# Altium PCB MAGI'sCore-OCL.PcbDoc
Units mm, origin at the board's own origin, x right, y up, seen from the top; angles counter-clockwise.
Board outline 152.4 x 101.6 mm, 2 copper layers (Top Layer, Bottom Layer); 19 components, 33 nets, 137 pads, 24 vias.
Unrouted connection lines stored in the file: 3.
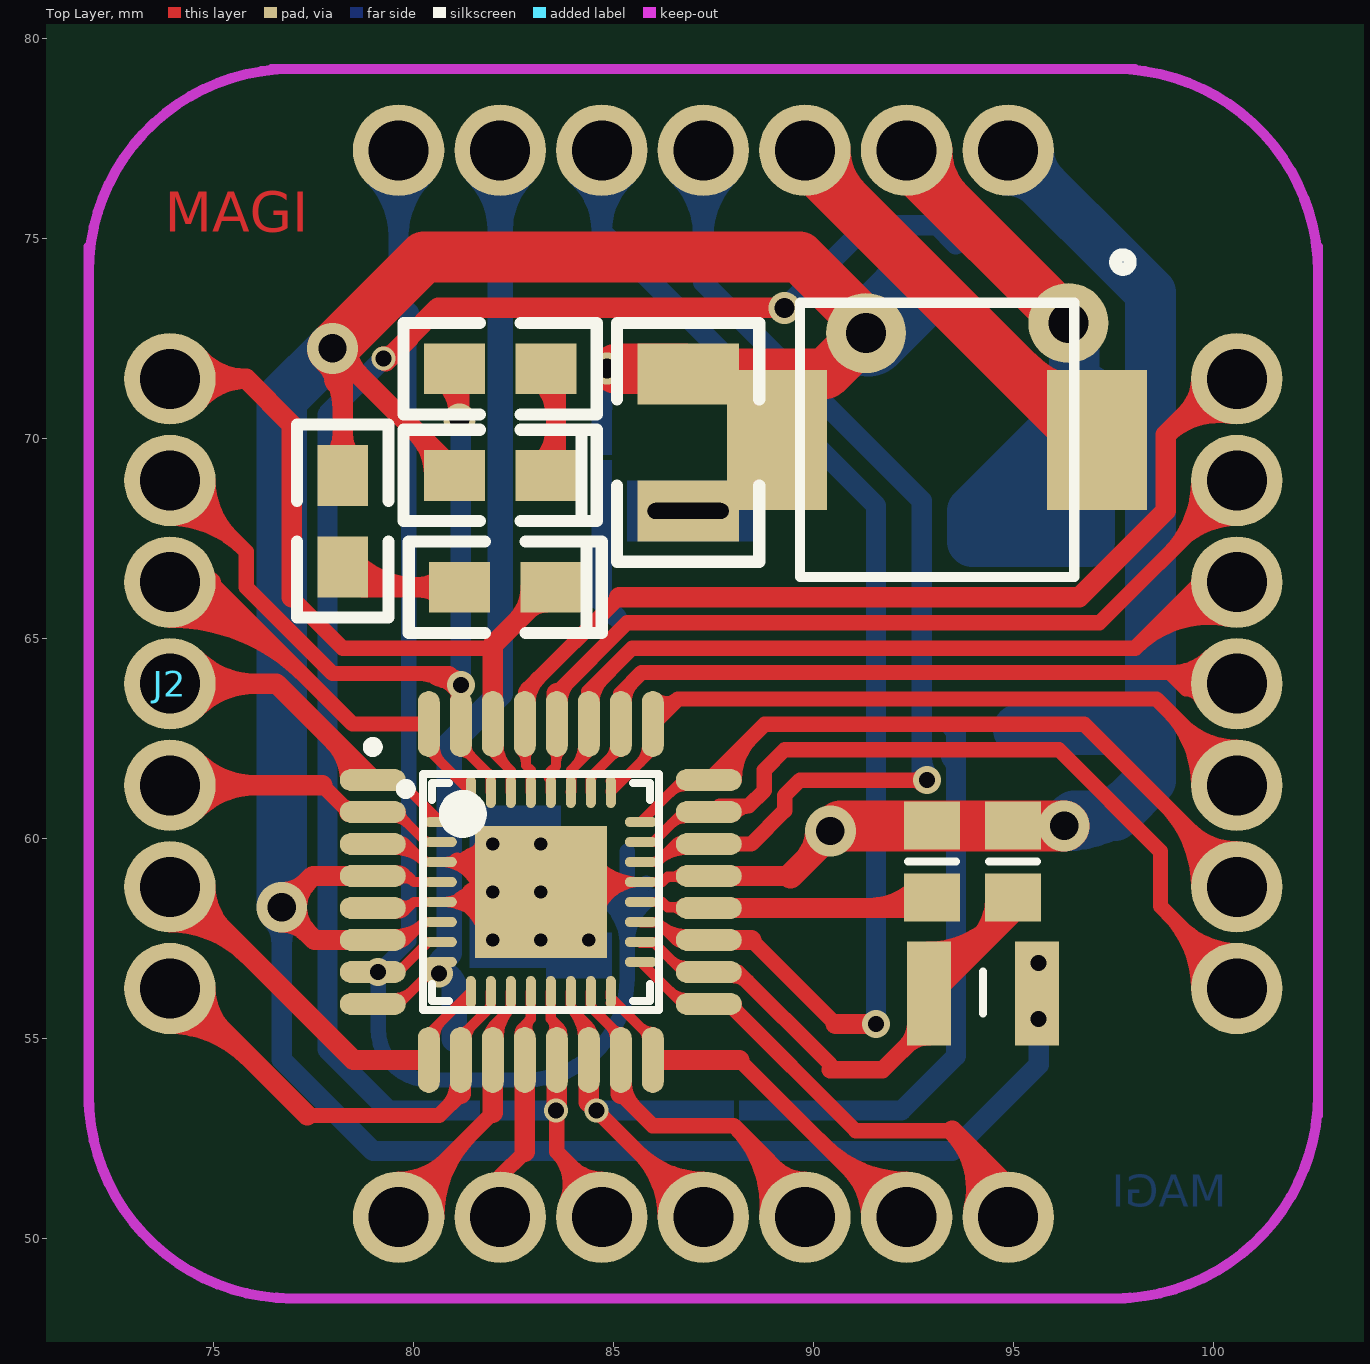
[diagram p0: Top Layer view]
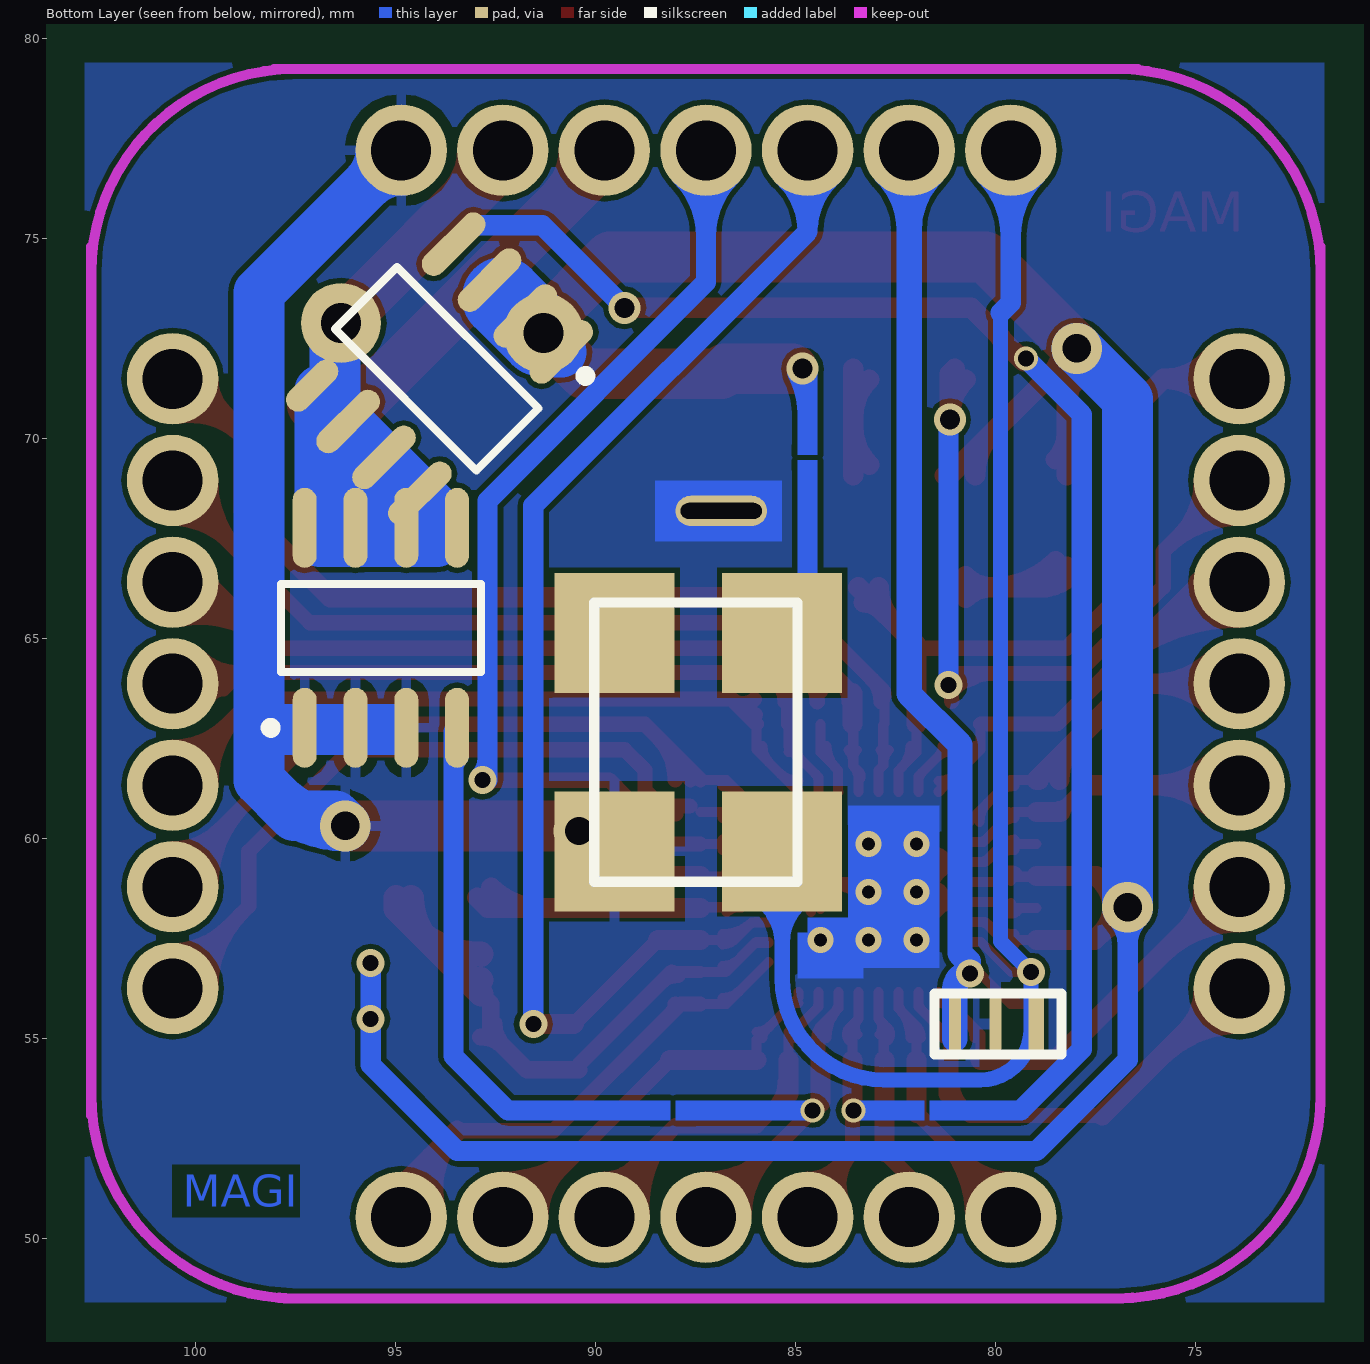
[diagram p1: Bottom Layer view, seen from below]

## Layer stack, top to bottom
Top Solder: solder mask 0.0102, Solder Resist, Dk 3.5
Top Layer: signal copper 0.0356
Dielectric1: dielectric 0.32, FR-4, Dk 4.8
Bottom Layer: signal copper 0.0356
Bottom Solder: solder mask 0.0102, Solder Resist, Dk 3.5

## Board outline
25.4,25.4 177.8,25.4 177.8,127 25.4,127

## Design rules (kind name [scope] priority, off if disabled: settings)
Clearance [All] p1: gap=0.127
ComponentClearance [All] p1: gap=0 collisioncheckmode=3 verticalgap=0 showdistances=FALSE
PolygonConnect [All] p1: connectstyle=Relief reliefconductorwidth=0.254 reliefentries=4 polygonreliefangle="90 Angle" airgapwidth=0.254
RoutingVias [All] p1: holewidth=0.711 width=1.27 viastyle="Through Hole" minholewidth=0.711 minwidth=1.27 maxholewidth=0.711 maxwidth=1.27
SilkToSilkClearance [All] p1: silktosilkclearance=0
SolderMaskExpansion [All] p1: expansion=0.102
Width [All] p1: maxlimit=2.54 minlimit=0.254 preferedwidth=0.254
27 further rules are at their usual default settings.

## Classes and differential pairs
component class MAGI'sCore: C1 C2 C3 J1 J2 J3 J4 L1 L2 LED1 LED2 OSC1 Q1 Q2 R1 R2 U1 U2

## Components (designator, comment, footprint, x,y, rotation, side; value= is the part's Value field where it differs from the comment)
C1 "CAP_1" 1210 86.868,68.199 r90 top
C2 "CAP_1" 6-0805_N 94.996,59.436 r270 top
C3 "CAP_1" 6-0805_N 92.964,59.436 r270 top
J1 "CON7" CON7 100.584,56.261 r90 top
J2 "CON7" CON7 73.914,71.501 r270 top
J3 "CON7" CON7 94.869,77.216 r180 top
J4 "CON7" CON7 79.629,50.546 r0 top
L1 "INDUCTOR" 22uh 93.091,69.977 r0 top
L2 "INDUCTOR" 14-1210 94.234,56.134 r0 top
LED1 "LED_3" 0805 81.153,66.294 r0 top
LED2 "LED_3" 0805 83.312,71.755 r180 top
OSC1 "Oscillator" Oscillator 86.868,62.103 r270 bottom
Q1 "SI9424DY" SO-8_N#1 93.98,71.755 r315 bottom
Q2 "SI9426DY" SO-8_N#2 95.377,65.278 r90 bottom
R1 "RES1_1" 0805 78.232,66.802 r90 top
R2 "RES1_1" 0805 83.312,69.088 r180 top
U1 "ATmega8A-AU" 32A_N 83.185,58.674 r0 top
U2 "ATmega8A-MU" 32M1-A_N 83.185,58.674 r0 top
XTAL? "CSTCE16M00G53" CSTCE_V 80.264,55.372 r0 bottom

## Footprints (in the part's own frame and the unit in brackets; to place one, negate y for a bottom-side part, rotate by r counter-clockwise, add the part's x,y. Pads: shape width x height; smd on the part's side, far side on the other; paste and mask are expansions set on the pad)
6-0805_N [mm] "Chip Resistor, Body 2.0x1.2mm, IPC Medium Density"
  rect 1.2x1.4 smd: 1(-0.9,0) 2(0.9,0)
  silkscreen extent 0,-0.6 0,0.6, body extent -1.07,-0.7 1.07,0.7, height 0.7
14-1210 [mm] "Chip Resistor, Body 3.2x2.5mm, IPC High Density"
  rect 1.1x2.6 smd: 1(-1.35,0) 2(1.35,0)
  silkscreen extent 0,-0.5 0,0.55, body extent -1.68,-1.32 1.68,1.32, height 0.9
22uh [mm]
  rect 2.5x3.5 smd: 1(-4,0) 2(4,0)
  silkscreen extent -3.43,-3.43 3.43,3.43
32A_N [mm] "32-Pin Thin Quad Flat Pack 0.8 mm Pitch, IPC Medium Density"
  oval 1.65x0.55 smd: 1(-4.2,2.8) 2(-4.2,2) 3(-4.2,1.2) 4(-4.2,0.4) 5(-4.2,-0.4) 6(-4.2,-1.2) 7(-4.2,-2) 8(-4.2,-2.8) 17(4.2,-2.8) 18(4.2,-2) 19(4.2,-1.2) 20(4.2,-0.4) 21(4.2,0.4) 22(4.2,1.2) 23(4.2,2) 24(4.2,2.8)
  oval 0.55x1.65 smd: 9(-2.8,-4.2) 10(-2,-4.2) 11(-1.2,-4.2) 12(-0.4,-4.2) 13(0.4,-4.2) 14(1.2,-4.2) 15(2,-4.2) 16(2.8,-4.2) 25(2.8,4.2) 26(2,4.2) 27(1.2,4.2) 28(0.4,4.2) 29(-0.4,4.2) 30(-1.2,4.2) 31(-2,4.2) 32(-2.8,4.2)
  silkscreen extent -4.32,-2.95 2.95,3.75, body extent -3.5,-3.5 3.5,3.5, height 1.2
32M1-A_N [mm] "QFN, 32-Leads, Body 5x5mm, Pitch 0.5mm, IPC Medium Density"
  oval 0.8x0.25 smd: 1(-2.5,1.75) 2(-2.5,1.25) 3(-2.5,0.75) 4(-2.5,0.25) 5(-2.5,-0.25) 6(-2.5,-0.75) 7(-2.5,-1.25) 8(-2.5,-1.75) 17(2.5,-1.75) 18(2.5,-1.25) 19(2.5,-0.75) 20(2.5,-0.25) 21(2.5,0.25) 22(2.5,0.75) 23(2.5,1.25) 24(2.5,1.75)
  oval 0.25x0.8 smd: 9(-1.75,-2.5) 10(-1.25,-2.5) 11(-0.75,-2.5) 12(-0.25,-2.5) 13(0.25,-2.5) 14(0.75,-2.5) 15(1.25,-2.5) 16(1.75,-2.5) 25(1.75,2.5) 26(1.25,2.5) 27(0.75,2.5) 28(0.25,2.5) 29(-0.25,2.5) 30(-0.75,2.5) 31(-1.25,2.5) 32(-1.75,2.5)
  rect 3.3x3.3 smd: 33(0,0)
  silkscreen extent -3.5,-2.73 2.73,2.73, body extent -2.58,-2.58 2.58,2.58, height 1
0805 [mil]
  rect 60x50 smd: 1(0,0) 2(90,0)
  silkscreen extent -50,-45 140,45
1210 [mil]
  rect 60x100 smd: 1(0,0) 2(135,0)
  silkscreen extent -50,-70 185,70
CON7 [mil]
  round 90 hole 59.06: 1(0,0) 2(100,0) 3(200,0) 4(300,0) 5(400,0) 6(500,0) 7(600,0)
CSTCE_V [mm]
  rect 0.381x1.6 smd: 1(-1.27,0)
  rect 0.3x1.6 smd: 2(-0.254,0) 3(0.762,0)
  silkscreen extent -1.91,-0.76 1.27,0.76
Oscillator [mm] "7mm*5mm"
  rect 3x3 smd: 1(-3.048,-2.667) 2(2.413,-2.667) 3(2.413,1.524) 4(-3.048,1.524)
  silkscreen extent -3.81,-3.18 3.18,1.91
SO-8_N#1 [mm] "SOIC, 8-Leads, Body 4.9x3.9mm, Pitch 1.27mm, IPC Medium Density"
  oval 2x0.6 smd: 1(-2.5,1.905) 2(-2.5,0.635) 3(-2.5,-0.635) 4(-2.5,-1.905) 6(2.5,-0.635) 7(2.5,0.635) 8(2.5,1.905)
  oval 1.6x0.6 smd: 5(2.5,-1.905)
  silkscreen extent -2.62,-2.5 1.1,2.88, body extent -2,-2.5 2,2.5, height 1.75
SO-8_N#2 [mm] "SOIC, 8-Leads, Body 4.9x3.9mm, Pitch 1.27mm, IPC Medium Density"
  oval 2x0.6 smd: 1(-2.5,1.905) 2(-2.5,0.635) 3(-2.5,-0.635) 4(-2.5,-1.905) 5(2.5,-1.905) 6(2.5,-0.635) 7(2.5,0.635) 8(2.5,1.905)
  silkscreen extent -2.62,-2.5 1.1,2.88, body extent -2,-2.5 2,2.5, height 1.75

## Part data
C1 C2 C3: "Capacitor"
J1 J2 J3 J4: "Connector"
Q1: "P-Channel 2.5V (G-S)  MOSFET"
Q2: "N-Channel 2.5V (G-S) Rated  MOSFET"
U1: "8-bit AVR Microcontroller, 8KB Flash, 512 Bytes EEPROM, 1KB SRAM, 32-pin TQFP, Industrial Grade (-40癈 to 85癈)"
U2: "8-bit AVR Microcontroller, 8KB Flash, 512 Bytes EEPROM, 1KB SRAM, 33-pin MLF, Industrial Grade (-40癈 to 85癈)"

## Free pads (board coordinates)
  round 2 hole 1: 0(96.373,72.898) 1(91.313,72.644)
  oval 2.286x0.762 hole 0.4 slot 2.032 at 0 deg: 1(86.868,68.199)

## Via types
v1: diameter 0.66, hole 0.33, Top Layer to Bottom Layer, tented top, 7 vias
v2: diameter 0.7, hole 0.4, Top Layer to Bottom Layer, 7 vias
v3: diameter 1.27, hole 0.711, Top Layer to Bottom Layer, 4 vias
v4: diameter 0.6, hole 0.4, Top Layer to Bottom Layer, 3 vias
v5: diameter 0.8, hole 0.5, Top Layer to Bottom Layer, 3 vias

## Nets (pads, with @x,y where several pads share a name; then routed paths per layer and width w, separated by ;. In a path a pad name is that pad's centre, name@x,y a point inside that pad or via, vN(x,y) a via of type N, cw(c..) or ccw(c..) an arc to the next point about the centre after c; other vN are vias at no path point)
ADC6: J3.5 U1.19 U2.19 | length 36.5
  Top Layer w0.254: U2.19 85.697,57.912 86.106,57.912 ; U2.19@85.96,57.926 cw(c85.96,57.607) 86.185,57.833 ; 86.525,57.493 ccw(c86.827,57.795) U1.19@86.838,57.368 ; U1.19@86.715,57.387 ccw(c86.544,57.262) 86.544,57.474 ; U1.19@86.715,57.561 cw(c86.544,57.686) 86.544,57.474 ; U1.19@86.831,57.622 cw(c86.807,58.613) 86.106,57.912 ; U1.19 86.544,57.474 ; 86.106,57.912 86.544,57.474
  Top Layer w0.381: 88.449,57.474 90.551,55.372
  Top Layer w0.508: U1.19 88.449,57.474 ; 90.551,55.372 v2(91.567,55.372)
  Bottom Layer w0.508: J3.5@84.106,76.563 cw(c82.831,75.184) 84.709,75.184 ; J3.5 84.709,75.184 ; J3.5@85.312,76.563 ccw(c86.587,75.184) 84.709,75.184 ; v2(91.567,55.372) 91.567,68.326 84.709,75.184
ADC7: J3.4 U1.22 U2.22 | length 33.7
  Top Layer w0.254: U2.22 86.094,59.424 ; U2.22@85.96,59.422 ccw(c85.96,59.741) 86.185,59.515 ; 86.522,59.852 cw(c86.832,59.542) U1.22@86.836,59.98 ; U1.22@86.715,59.787 ccw(c86.544,59.662) 86.544,59.874 ; U1.22@86.715,59.961 cw(c86.544,60.086) 86.544,59.874 ; U1.22@86.834,59.726 ccw(c86.823,58.695) 86.094,59.424 ; U1.22 86.544,59.874 ; 86.094,59.424 86.544,59.874
  Top Layer w0.381: U1.22 88.449,59.874 89.281,60.706 89.281,61.087 89.662,61.468 v2(92.837,61.468) ; 92.452,61.468 cw(c92.452,61.083) 92.724,61.355 ccw(c92.452,61.083) 92.452,61.468 ; 92.452,61.468 ccw(c92.452,61.853) 92.724,61.581 cw(c92.452,61.853) 92.452,61.468
  Bottom Layer w0.508: J3.4@86.62,76.587 cw(c85.103,75.07) 87.249,75.07 cw(c89.395,75.07) J3.4@87.878,76.587 ; J3.4 87.249,73.914 92.71,68.453 v2@92.71,61.468 ; 92.71,62.006 ccw(c93.375,62.006) 92.905,61.536 cw(c93.375,62.006) 92.71,62.006
GND: C1.1 C2.1 C3.1 J3.1 OSC1.2 pad.1@86.868,68.199 Q2.1 Q2.2 Q2.3 U1.3 U1.5 U1.21 U2.3 U2.5 U2.21 U2.33 XTAL?.2 | length 113.6
  Top Layer w0.254: U1.5 79.864,58.274 ; U1.3 79.826,59.874 ; U1.5@79.473,58.188 ccw(c79.623,58.395) 79.804,58.214 ; U1.3@79.534,59.98 cw(c79.538,59.542) 79.848,59.852 ; U1.3@79.536,59.726 cw(c79.547,58.695) 80.276,59.424 ; U1.5@79.622,58.394 ccw(c79.8,58.638) 80.014,58.424 ; U1.5@79.646,58.176 cw(c79.864,57.982) 79.864,58.274 ; U1.5@79.646,58.372 ccw(c79.864,58.566) 79.864,58.274 ; U1.3@79.655,59.787 cw(c79.826,59.662) 79.826,59.874 ; U1.3@79.655,59.961 ccw(c79.826,60.086) 79.826,59.874 ; 80.185,59.515 ccw(c80.41,59.741) U2.3@80.41,59.422 ; U2.3@80.958,59.425 cw(c81.164,59.306) 81.103,59.536 ; U2.3@80.964,59.424 cw(c80.964,58.462) U2.33@81.922,58.554 ; U2.5@81.043,58.424 ccw(c81.043,59.424) U2.33@81.987,59.094 ; 81.128,58.542 cw(c81.478,58.125) U2.33@81.847,58.525 ; 81.175,58.487 cw(c81.54,57.73) U2.33@81.898,58.49 ; 81.184,58.424 cw(c81.184,57.219) U2.33@82.159,57.928 ; 81.244,59.424 cw(c81.244,58.489) U2.33@82.175,58.578 ; 81.283,59.569 cw(c81.706,59.034) U2.33@81.921,59.681 ; 81.319,59.424 ccw(c81.319,60.54) U2.33@82.108,59.751 ; 81.337,58.526 cw(c81.588,58.092) U2.33@81.871,58.506 ; 81.34,58.28 cw(c80.564,57.332) U2.33@81.783,57.454 ; 81.349,58.727 cw(c81.675,58.339) U2.33@82.02,58.711 ; 81.401,58.424 ccw(c81.401,59.299) U2.33@82.227,59.01 ; 81.493,59 ccw(c82.04,59.204) U2.33@81.98,58.623 ; 81.501,58.464 ccw(c81.299,58.968) U2.33@81.798,58.754 ; 81.523,59.424 cw(c81.523,58.516) U2.33@82.427,58.602 ; 81.524,59.414 ccw(c81.265,59.861) U2.33@81.782,59.87 ; U2.33@81.569,58.913 cw(c81.872,58.552) U2.33@82.192,58.898 ; U2.33@81.57,58.492 cw(c81.733,58.086) U2.33@81.905,58.487 ; U2.33@81.594,59.502 ccw(c81.287,59.891) U2.33@81.782,59.879 ; U2.33@81.637,58.616 ccw(c81.993,58.749) U2.33@81.953,58.371 ; U2.33@81.652,59.861 cw(c81.884,59.569) U2.33@82.001,59.922 ; U2.33@81.655,58.719 cw(c81.832,58.351) U2.33@82.007,58.72 ; U2.33@81.669,58.435 ccw(c81.554,58.634) U2.33@81.783,58.655 ; U2.33@81.669,58.53 ccw(c80.685,58.436) U2.3 ; U2.33@81.688,58.446 cw(c81.849,58.167) U2.33@81.932,58.478 ; U2.33@81.707,59.13 ccw(c82.082,59.27) U2.33@82.018,58.874 ; U2.33@81.724,59.605 cw(c81.924,59.353) U2.33@81.961,59.672 ; U2.33@81.748,59.178 cw(c80.685,59.55) U2.5 cw(c80.685,56.856) U2.33@81.953,57.778 ; U2.33@81.783,59.325 cw(c81.45,58.819) U2.33@82.034,58.661 ; U2.33@81.814,57.892 cw(c81.427,57.418) U2.33@82.036,57.479 ; U2.33@81.954,58.977 cw(c81.997,58.557) U2.33@82.399,58.689 ; U2.33@81.981,58.877 ccw(c81.974,59.185) 82.232,59.018 ccw(c82.551,58.812) U2.33@82.182,58.722 ; U2.33@82.076,59.132 cw(c81.806,58.723) U2.33@82.279,58.594 ; U2.33@82.114,58.517 cw(c82.324,58.262) U2.33@82.518,58.529 ; U2.33@82.537,58.526 cw(c82.788,58.092) U2.33@83.071,58.506 ; U2.33@82.869,58.435 ccw(c82.754,58.634) U2.33@82.983,58.655 ; U2.33@82.888,58.446 cw(c83.049,58.167) U2.33@83.132,58.478 ; U2.33@83.238,58.87 ccw(c83.321,59.181) U2.33@83.482,58.902 ; U2.33@83.299,58.842 ccw(c83.582,59.256) U2.33@83.833,58.822 ; U2.33@83.387,58.693 cw(c83.616,58.714) U2.33@83.501,58.913 ; U2.33@84.143,58.338 cw(c84.969,58.049) 84.969,58.924 ; U2.33@84.211,59.42 ccw(c85.186,60.129) 85.186,58.924 ; U2.33@84.383,58.254 cw(c85.327,57.924) U2.21@85.327,58.924 ; U2.33@84.417,59.57 ccw(c85.685,60.492) U2.21 ccw(c85.685,57.798) U2.33@84.622,58.17 ; 86.432,59.055 ccw(c86.432,59.477) U1.21@86.73,59.179 ; 86.524,59.055 cw(c86.524,58.763) U1.21@86.73,58.969 ; U1.21 87.366,59.055 86.36,59.055 86.229,58.924 U2.21 U2.33@83.435,58.924 ; 79.826,59.874 80.276,59.424 ; 79.864,58.274 80.014,58.424 ; 80.014,58.424 U2.5 U2.33@82.935,58.424 ; 80.276,59.424 U2.3 82.435,59.424 v1(83.185,58.674) ; U2.3 ccw(c80.685,60.841) 81.822,59.995 cw(c80.685,60.841) U2.3 ; U2.33@82.838,59.021 cw(c82.492,58.674) 82.982,58.674 ccw(c82.492,58.674) U2.33@82.838,59.021 ; U2.33@82.838,59.021 ccw(c83.185,59.367) 83.185,58.877 cw(c83.185,59.367) U2.33@82.838,59.021 ; U2.33@82.935,58.424 cw(c82.935,59.444) 82.143,58.802 ccw(c82.935,59.444) U2.33@82.935,58.424 ; U2.33@82.935,58.424 cw(c83.081,58.278) 83.133,58.478 ccw(c83.081,58.278) U2.33@82.935,58.424 ; U2.33@82.935,58.424 ccw(c82.789,58.57) 82.989,58.622 cw(c82.789,58.57) U2.33@82.935,58.424 ; U2.33@82.935,58.424 v1(83.185,58.674) ; v1(83.185,58.674) U2.33@83.435,58.924 ; U2.33@83.435,58.924 cw(c83.289,59.07) 83.237,58.87 ccw(c83.289,59.07) U2.33@83.435,58.924 ; U2.33@83.435,58.924 ccw(c83.581,58.778) 83.381,58.726 cw(c83.581,58.778) U2.33@83.435,58.924 ; U2.5@80.891,58.424 ccw(c80.891,59.768) 81.841,58.818 cw(c80.891,59.768) U2.5@80.891,58.424 ; 81.191,59.424 ccw(c81.191,60.465) 82.026,59.844 cw(c81.191,60.465) 81.191,59.424 ; 81.505,58.424 ccw(c81.505,59.154) 82.021,58.638 cw(c81.505,59.154) 81.505,58.424 ; U2.33@81.696,59.424 ccw(c81.696,60.089) 82.23,59.692 cw(c81.696,60.089) U2.33@81.696,59.424 ; U2.33@81.945,58.642 ccw(c82.402,59.012) 82.402,58.424 cw(c82.402,59.012) U2.33@81.945,58.642 ; U2.33@82.091,58.424 ccw(c82.091,59.768) 83.041,58.818 cw(c82.091,59.768) U2.33@82.091,58.424 ; U2.33@82.705,58.424 ccw(c82.705,59.154) 83.221,58.638 cw(c82.705,59.154) U2.33@82.705,58.424 ; U2.33@83.149,58.71 cw(c83.665,58.194) 83.665,58.924 ccw(c83.665,58.194) U2.33@83.149,58.71 ; U2.33@83.329,58.53 cw(c84.279,57.58) 84.279,58.924 ccw(c84.279,57.58) U2.33@83.329,58.53
  Top Layer w0.508: U1.21 89.427,59.074
  Top Layer w0.635: 89.427,59.074 v3@90.551,60.198 ; 89.792,59.439 ccw(c89.033,60.198) 90.106,60.198 cw(c89.033,60.198) 89.792,59.439
  Top Layer w0.762: v3@90.551,60.198 v3@90.678,60.325
  Top Layer w1.27: v3@90.678,60.325 v3(96.266,60.325)
  Bottom Layer w1.27: J3.1@94.869,76.708 cw(c94.869,75.482) 95.736,76.349 cw(c96.603,77.216) J3.1@95.377,77.216 ; J3.1 98.425,73.66 98.425,62.738 ; 95.123,62.738 98.425,62.738 ; v3(96.266,60.325) ccw(c96.266,62.778) 98,61.043 cw(c96.266,62.778) v3(96.266,60.325) ; v3(96.266,60.325) 96.52,60.579 97.536,60.579 98.425,61.468 98.425,62.738
  other v1: 81.985,57.474 83.185,57.474 84.385,57.474 81.985,58.674 81.985,59.874 83.185,59.874
  other v3: 90.424,60.198
MISO: J4.6 U1.16 U2.16 | length 16.1
  Top Layer w0.254: U2.16@84.935,55.901 cw(c84.935,55.578) 85.164,55.806 ; U2.16 84.935,56.035 85.985,54.985 U1.16 ; 85.666,55.304 ccw(c85.985,55.623) U1.16@85.985,55.172 ; 85.76,55.21 cw(c85.574,55.024) U1.16@85.837,55.024
  Top Layer w0.381: 88.147,54.474 J4.6@92.075,50.546 ; 90.269,52.352 ccw(c92.329,54.411) J4.6@92.329,51.498 ; 90.883,51.738 cw(c89.69,50.546) J4.6@91.376,50.546 ; 90.92,51.701 ccw(c92.329,53.11) J4.6@92.329,51.117
  Top Layer w0.508: U1.16 88.147,54.474 ; J4.6@92.075,50.546 J4.6
MOSI: J4.5 U1.15 U2.15 | length 16.8
  Top Layer w0.254: U2.15@84.433,55.899 ccw(c84.658,55.899) 84.499,55.74 ; U2.15 84.435,55.804 85.185,55.054 U1.15 ; 84.911,55.328 cw(c84.608,55.024) U1.15@85.037,55.024 ; 84.983,55.256 ccw(c85.185,55.457) U1.15@85.185,55.172
  Top Layer w0.381: 85.185,53.626 85.979,52.832 88.011,52.832 ; U1.15@85.269,53.924 ccw(c86.193,53.924) 85.54,53.271 ; 88.601,52.242 cw(c87.097,50.738) J4.5@89.219,50.587 ; J4.5@88.839,50.614 ccw(c85.995,50.816) 88.011,52.832 ; 89.03,51.813 ccw(c89.789,52.572) J4.5@89.789,51.498 ; 89.191,51.652 cw(c88.199,50.659) J4.5@89.599,50.56 ; J4.5@89.789,51.054 88.011,52.832
  Top Layer w0.508: 85.185,53.626 U1.15 ; J4.5 J4.5@89.789,51.054
NetC2_2: C2.2 L2.1 U1.18 U2.18 | length 19.4
  Top Layer w0.254: U2.18@85.685,57.404 U2.18@86.016,57.404 ; U2.18 85.996,57.424 U2.18@86.016,57.404 ; 86.43,56.99 ccw(c86.835,57.394) U1.18@86.835,56.822 ; U1.18 86.746,56.674 U2.18@86.016,57.404
  Top Layer w0.305: U1.18 U1.18@88.106,56.674
  Top Layer w0.381: U1.18@87.935,56.59 cw(c87.935,55.973) 88.371,56.409 ; U1.18@88.106,56.674 90.424,54.356 90.424,54.229
  Top Layer w0.432: 90.424,54.229 91.729,54.229 92.63,55.13 92.63,55.88 L2.1 ; L2.1@92.55,55.384 cw(c91.743,55.384) 92.314,54.814 cw(c92.884,54.243) L2.1@92.884,55.05
  Top Layer w0.635: L2.1 94.996,58.246 C2.2 ; L2.1@92.884,56.482 ccw(c92.884,57.32) 93.477,56.727 ; L2.1@92.884,57.117 ccw(c92.884,59.488) 94.561,57.811 ; 94.138,57.388 ccw(c92.99,58.536) C2.2@94.614,58.536
NetC3_2: C3.2 U1.20 U2.20 | length 9.4
  Top Layer w0.254: U2.20 86.229,58.424 86.36,58.293 87.366,58.293 U1.20 ; 86.432,58.293 cw(c86.432,57.871) U1.20@86.73,58.169 ; 86.524,58.293 ccw(c86.524,58.585) U1.20@86.73,58.379
  Top Layer w0.508: U1.20 92.702,58.274 C3.2 ; 91.396,58.274 ccw(c91.396,60.004) C3.2@92.619,58.781
NetJ1_1: J1.1 U1.23 U2.23 | length 25.9
  Top Layer w0.254: U2.23 85.996,59.924 86.746,60.674 U1.23 ; 86.43,60.358 cw(c86.835,59.954) U1.23@86.835,60.526
  Top Layer w0.381: U1.23@87.656,60.822 88.381,60.822 ; U1.23@88.004,60.626 cw(c88.381,60.362) 88.381,60.822 ; 98.851,58.145 cw(c96.967,56.261) J1.1@99.632,56.261 ; 99.216,57.78 ccw(c100.584,59.148) J1.1@100.584,57.213 ; 99.502,57.494 cw(c98.268,56.261) J1.1@100.013,56.261 ; J1.1@100.965,55.626 100.965,56.031 98.679,58.317 98.679,59.69 96.139,62.23 89.281,62.23 88.773,61.722 88.773,61.214 88.381,60.822
NetJ1_2: J1.2 U1.24 U2.24 | length 25.9
  Top Layer w0.254: U2.24 86.735,61.474 U1.24 ; 86.412,61.151 cw(c86.835,60.727) U1.24@86.835,61.326
  Top Layer w0.381: U1.24 88.776,62.865 96.774,62.865 100.965,58.674 J1.2@100.965,58.166 ; U1.24@87.638,61.474 cw(c88.25,61.474) 87.818,61.907 ; U1.24@88.019,61.474 cw(c89.551,61.474) 88.468,62.557 ; 98.778,60.861 cw(c96.719,58.801) J1.2@99.632,58.801 ; 99.392,60.247 ccw(c100.584,61.44) J1.2@100.584,59.753 ; 99.429,60.21 cw(c98.02,58.801) J1.2@100.013,58.801
NetJ1_3: J1.3 U1.25 U2.25 | length 25.8
  Top Layer w0.254: U2.25 85.985,62.224 U1.25 ; U2.25@84.935,61.193 ccw(c84.935,61.239) U2.25@84.967,61.206 ; U2.25@84.935,61.447 ccw(c84.935,62.106) 85.401,61.64 ; 85.662,61.901 ccw(c85.238,62.324) U1.25@85.837,62.324
  Top Layer w0.381: U1.25 86.611,63.5 ; U1.25@86.009,63.104 ccw(c86.05,63.496) 86.329,63.218 ; U1.25@86.042,63.487 ccw(c86.319,63.792) 86.611,63.5 ; 98.851,63.225 cw(c96.967,61.341) J1.3@99.632,61.341 ; 99.216,62.86 ccw(c100.584,64.228) J1.3@100.584,62.293 ; 99.502,62.574 cw(c98.268,61.341) J1.3@100.013,61.341 ; J1.3@100.965,60.706 100.965,61.111 98.576,63.5 86.611,63.5
NetJ1_4: J1.4 U1.26 U2.26 | length 24.5
  Top Layer w0.254: U2.26@84.433,61.449 cw(c84.672,61.449) 84.503,61.618 ; U2.26 84.435,61.55 85.185,62.3 U1.26 ; 84.915,62.03 ccw(c84.622,62.324) U1.26@85.037,62.324 ; 84.973,62.088 cw(c85.185,61.877) U1.26@85.185,62.176
  Top Layer w0.381: U1.26 85.185,63.638 85.705,64.158 98.91,64.158 ; U1.26@85.269,63.424 cw(c85.99,63.424) 85.481,63.934 ; 98.953,64.158 ccw(c98.953,65.512) J1.4@99.91,64.555 ; 99.429,64.158 cw(c99.429,63.519) J1.4@100.039,63.71 ; J1.4@99.644,64.034 cw(c99.314,64.088) 99.314,63.754 ; J1.4@99.675,63.596 ccw(c98.91,63.356) 98.91,64.158 ; J1.4@99.714,63.494 ccw(c99.314,63.317) 99.314,63.754 ; J1.4@99.845,64.158 98.91,64.158 ; J1.4@100.457,63.754 99.314,63.754 ; 98.91,64.158 99.314,63.754
NetJ1_5: J1.5 U1.27 U2.27 | length 27.4
  Top Layer w0.254: U2.27 83.947,61.186 83.947,61.722 84.385,62.16 U1.27 ; 84.016,61.791 ccw(c83.484,62.324) U1.27@84.237,62.324
  Top Layer w0.381: U1.27@84.385,63.684 85.471,64.77 98.044,64.77 ; U1.27@84.469,63.424 cw(c85.301,63.424) 84.713,64.012 ; 98.549,65.275 cw(c100.06,63.764) J1.5@100.473,65.86 ; 99.054,65.78 cw(c100.226,64.608) J1.5@100.547,66.234 ; J1.5@99.695,66.421 98.044,64.77 ; J1.5@100.4,65.487 ccw(c99.893,62.921) 98.044,64.77
  Top Layer w0.508: J1.5@99.695,66.421 100.33,66.421 J1.5@100.965,65.786
NetJ1_6: J1.6 U1.28 U2.28 | length 29.5
  Top Layer w0.254: U2.28@83.433,61.449 cw(c83.893,61.497) 83.566,61.824 ; U2.28@83.434,61.448 cw(c83.558,61.57) 83.435,61.693 ; U2.28 83.435,61.693 ; U1.28@83.48,62.219 cw(c83.274,62.013) 83.566,62.013 ; 83.566,61.921 cw(c83.988,61.921) U1.28@83.69,62.219 ; U1.28 83.566,62.855 83.566,61.824 ; 83.435,61.693 83.566,61.824
  Top Layer w0.381: U1.28@83.585,63.646 85.344,65.405 97.155,65.405 J1.6@100.076,68.326 ; U1.28@83.669,63.424 cw(c84.409,63.424) 83.886,63.947 ; 98.868,67.118 ccw(c97.025,68.961) J1.6@99.632,68.961 ; 99.175,67.425 cw(c100.584,66.016) J1.6@100.584,68.008 ; 99.519,67.769 ccw(c98.326,68.961) J1.6@100.013,68.961 ; 99.825,68.075 cw(c100.584,67.316) J1.6@100.584,68.389
  Top Layer w0.508: U1.28 U1.28@83.585,63.646 ; J1.6@100.076,68.326 J1.6@100.965,68.326
NetJ2_3: J2.3 U1.32 U2.32 | length 21.4
  Top Layer w0.254: U1.32 80.385,62.224 U2.32 ; U1.32@80.533,62.324 ccw(c81.132,62.324) 80.708,61.901 ; 80.969,61.64 ccw(c81.435,62.106) U2.32@81.435,61.447 ; U2.32@81.403,61.206 ccw(c81.435,61.239) U2.32@81.435,61.193
  Top Layer w0.381: J2.3@73.914,65.468 cw(c73.914,60.716) 77.274,64.077 ; J2.3@73.914,65.849 cw(c73.914,62.017) 76.624,64.727 ; J2.3@73.914,66.23 cw(c73.914,63.318) 75.974,65.377 ; J2.3@73.914,66.611 cw(c73.914,64.619) 75.323,66.028 ; J2.3@74.93,66.421 78.477,62.874 U1.32
  Top Layer w0.508: J2.3@74.168,66.421 J2.3@74.93,66.421
NetJ2_4: J2.4 U1.1 U2.1 | length 13.5
  Top Layer w0.254: U1.1 79.635,61.474 U2.1 ; U1.1@79.535,61.326 cw(c79.535,60.727) 79.958,61.151 ; 80.219,60.89 cw(c79.753,60.424) U2.1@80.412,60.424 ; U2.1@80.653,60.456 cw(c80.62,60.424) U2.1@80.666,60.424
  Top Layer w0.508: J2.4@74.168,63.881 76.578,63.881 U1.1 ; J2.4@74.543,63.252 cw(c76.06,61.735) 76.06,63.881 cw(c76.06,66.027) J2.4@74.543,64.51 ; 78.01,62.449 cw(c77.035,61.474) U1.1@78.414,61.474 ; U1.1@78.877,61.582 cw(c78.77,61.474) U1.1@78.922,61.474
NetJ2_5: J2.5 U1.2 U2.2 | length 11.7
  Top Layer w0.254: U1.2 79.565,60.674 80.315,59.924 U2.2 ; U1.2@79.535,60.526 cw(c79.535,60.097) 79.839,60.4 ; U1.2@79.683,60.674 ccw(c79.968,60.674) 79.767,60.472 ; 80.251,59.988 ccw(c80.41,60.147) U2.2@80.41,59.922
  Top Layer w0.381: 77.724,61.341 U1.2@78.391,60.674 ; 78.216,60.849 ccw(c78.435,61.069) U1.2@78.435,60.758
  Top Layer w0.508: J2.5 77.724,61.341 ; J2.5@74.543,60.712 cw(c76.06,59.195) 76.06,61.341 cw(c76.06,63.487) J2.5@74.543,61.97 ; U1.2@78.391,60.674 U1.2
NetJ2_6: J2.6 U1.9 U2.9 | length 15.7
  Top Layer w0.254: U1.9 80.385,55.124 U2.9 ; U1.9@80.533,55.024 cw(c81.132,55.024) 80.708,55.447 ; 80.969,55.708 cw(c81.435,55.242) U2.9@81.435,55.901 ; U2.9@81.403,56.142 cw(c81.435,56.109) U2.9@81.435,56.155
  Top Layer w0.508: J2.6@73.914,57.912 cw(c73.914,55.153) 75.865,57.104 ; J2.6@73.914,58.42 cw(c73.914,56.887) 74.998,57.971 ; J2.6@74.168,58.801 78.495,54.474 U1.9 ; J2.6@74.803,58.801 ccw(c76.336,58.801) 75.252,57.717
NetJ2_7: J2.7 U1.10 U2.10 | length 17.5
  Top Layer w0.254: U1.10 81.185,55.054 81.935,55.804 U2.10 ; U1.10@81.185,55.172 ccw(c81.185,55.457) 81.387,55.256 ; U1.10@81.333,55.024 cw(c81.762,55.024) 81.459,55.328 ; 81.871,55.74 ccw(c81.712,55.899) U2.10@81.937,55.899
  Top Layer w0.381: 77.343,53.086 80.645,53.086 81.185,53.626 ; 80.83,53.271 ccw(c80.177,53.924) U1.10@81.101,53.924
  Top Layer w0.508: J2.7@73.914,55.372 cw(c73.914,52.613) 75.865,54.564 ; J2.7@73.914,55.88 cw(c73.914,54.347) 74.998,55.431 ; J2.7@74.168,56.261 77.343,53.086 ; J2.7@74.803,56.261 ccw(c76.336,56.261) 75.252,55.177 ; 81.185,53.626 U1.10
NetJ4_1: J4.1 U1.11 U2.11 | length 13.8
  Top Layer w0.254: U1.11@81.879,55.023 cw(c82.318,55.027) 82.007,55.337 ; U1.11@81.898,55.144 ccw(c81.773,55.315) 81.985,55.315 ; U1.11 81.985,55.315 ; U1.11@82.072,55.144 cw(c82.197,55.315) 81.985,55.315 ; U1.11@82.133,55.025 cw(c83.164,55.036) 82.435,55.765 ; 82.344,55.674 ccw(c82.118,55.899) U2.11@82.437,55.899 ; U2.11 82.435,55.765 ; 81.985,55.315 82.435,55.765
  Top Layer w0.381: J4.1@79.629,50.8 81.985,53.156 ; J4.1@79.629,51.498 ccw(c79.629,53.185) 80.821,51.992 ; J4.1@80.2,50.546 cw(c82.193,50.546) 80.784,51.955 ; J4.1@80.581,50.546 cw(c83.494,50.546) 81.435,52.606
  Top Layer w0.508: J4.1 J4.1@79.629,50.8 ; 81.985,53.156 U1.11
NetJ4_2: J4.2 U1.12 U2.12 | length 7.2
  Top Layer w0.254: U1.12@82.692,55.139 ccw(c82.506,55.372) 82.804,55.372 ; U1.12@82.699,54.962 cw(c82.906,55.112) 82.725,55.293 ; U1.12@82.804,54.493 82.804,55.372 ; 82.804,55.335 ccw(c83.096,55.335) U1.12@82.89,55.129 ; U1.12@82.905,55.111 cw(c83.149,55.289) 82.935,55.503 ; U2.12 82.935,55.503 ; 82.804,55.372 82.935,55.503
  Top Layer w0.381: J4.2 82.169,51.562 82.785,52.178
  Top Layer w0.508: 82.785,52.178 U1.12
NetLED1_1: LED1.1 R1.1 | length 7.1
  Top Layer w0.508: R1.1@78.142,66.585 ccw(c78.845,67.288) R1.1@78.845,66.294 ; R1.1 78.74,66.294 LED1.1 ; R1.1@78.501,66.944 ccw(c80.072,68.515) 80.072,66.294 ; LED1.1@80.757,66.025 ccw(c80.106,65.374) 80.106,66.294 ccw(c80.106,67.214) LED1.1@80.757,66.563
NetLED2_1: LED2.1 R2.1 | length 4.8
  Top Layer w0.508: R2.1@83.17,69.357 ccw(c82.213,70.314) 83.566,70.314 ; LED2.1@83.17,71.486 cw(c82.213,70.529) 83.566,70.529 ; R2.1@83.566,69.088 LED2.1@83.566,71.755
OC1A: J4.3 Q1.4 U1.13 U2.13 | length 50
  Top Layer w0.254: U2.13 83.435,55.503 ; U1.13@83.465,55.111 ccw(c83.221,55.289) 83.435,55.503 ; U1.13@83.487,55.135 ccw(c83.293,55.353) 83.585,55.353 ; U1.13 83.585,55.353 ; 83.645,55.293 cw(c83.464,55.112) U1.13@83.671,54.962 ; U1.13@83.683,55.135 cw(c83.877,55.353) 83.585,55.353 ; 83.435,55.503 83.585,55.353
  Top Layer w0.381: v4@83.585,53.213 83.585,52.178 ; J4.3@83.832,50.916 ccw(c82.771,51.364) 83.585,52.178 ; 83.95,51.813 ccw(c84.709,52.572) J4.3@84.709,51.498 ; 83.985,51.778 cw(c83.334,51.127) J4.3@84.183,50.768 ; J4.3 84.709,51.054 83.585,52.178
  Top Layer w0.508: v4@79.311,71.945 79.883,72.517 79.883,72.548 80.614,73.279 v5(89.281,73.279) ; v4@83.585,53.213 U1.13 ; v4@79.248,72.055 ccw(c79.248,72.473) 79.543,72.177 cw(c79.248,72.473) v4@79.248,72.055
  Bottom Layer w0.508: v4(79.248,72.009) 77.851,70.612 77.851,54.737 79.375,53.213 81.407,53.213 ; 82.804,53.213 v4(83.566,53.213) ; v5@89.281,73.406 89.408,73.406 91.34,75.338 93.091,75.338 Q1.4
OC1B: J4.4 Q2.4 U1.14 U2.14 | length 32
  Top Layer w0.254: U2.14@83.933,55.899 ccw(c84.252,55.899) 84.026,55.674 ; U2.14 83.935,55.765 ; U1.14@84.237,55.025 ccw(c83.206,55.036) 83.935,55.765 ; U1.14@84.298,55.144 ccw(c84.173,55.315) 84.385,55.315 ; 84.363,55.337 cw(c84.052,55.027) U1.14@84.491,55.023 ; U1.14 84.385,55.315 ; U1.14@84.472,55.144 cw(c84.597,55.315) 84.385,55.315 ; 83.935,55.765 84.385,55.315
  Top Layer w0.381: v4@84.385,53.41 v4(84.582,53.213) J4.4 ; J4.4@86.296,50.546 ccw(c83.997,50.546) 85.623,52.172 ccw(c87.249,53.798) J4.4@87.249,51.498 ; J4.4@86.677,50.546 ccw(c85.298,50.546) 86.273,51.522 ccw(c87.249,52.497) J4.4@87.249,51.118
  Top Layer w0.508: v4@84.385,53.41 U1.14
  Bottom Layer w0.5: 88.392,53.213 92.202,53.213 93.564,54.575 93.564,62.686 Q2.4 ; Q2.4@93.437,62.043 cw(c93.129,61.735) 93.564,61.735
  Bottom Layer w0.508: v4(84.582,53.213) 87.63,53.213
PB6: J3.7 OSC1.3 U1.7 U2.7 XTAL?.1 | length 44.2
  Top Layer w0.254: U1.7 v2(79.121,56.674) 79.624,56.674 80.374,57.424 U2.7
  Bottom Layer w0.381: 79.883,73.152 79.883,57.436 v2(79.121,56.674) 79.121,55.245 ccw(c80.391,55.245) 80.391,53.975 82.804,53.975 ccw(c82.804,56.515) 85.344,56.515 OSC1.3 ; OSC1.3@84.674,58.565 cw(c83.974,57.387) 85.344,57.387 cw(c86.714,57.387) OSC1.3@86.014,58.565 ; OSC1.3@84.869,58.892 cw(c84.372,58.057) 85.344,58.057 cw(c86.316,58.057) OSC1.3@85.819,58.892
  Bottom Layer w0.508: J3.7@79,76.587 cw(c77.483,75.07) 79.629,75.07 cw(c81.775,75.07) J3.7@80.258,76.587 ; J3.7 79.629,73.406 79.883,73.152
PB7: J3.6 U1.8 U2.8 XTAL?.3 | length 28.5
  Top Layer w0.254: U1.8 79.635,55.874 U2.8 ; U1.8@79.535,56.022 ccw(c79.535,56.621) 79.958,56.197
  Bottom Layer w0.635: v2(80.645,56.642) cw(c80.645,56.261) 81.026,56.261 81.026,55.499 XTAL?.3@81.026,54.991 ; v2@80.696,56.935 80.899,57.138 80.899,62.357 82.169,63.627 J3.6 ; J3.6@81.585,76.632 cw(c80.176,75.223) 82.169,75.223 cw(c84.162,75.223) J3.6@82.753,76.632
PO: J3.2 pad.0 Q1.5 Q1.6 Q1.7 Q1.8 Q2.5 Q2.6 Q2.7 Q2.8 | length 28.4
  Top Layer w1.27: J3.2 92.329,76.942 pad.0 ; J3.2@92.837,77.216 ccw(c94.726,77.216) 93.39,75.88
  Bottom Layer w1.27: 93.995,67.437 ccw(c93.995,69.046) 95.133,67.908 ; 94.042,67.455 cw(c95.759,66.988) Q1.8@94.695,68.414 ; Q1.8@94.407,68.478 cw(c94.764,68.478) Q1.8@94.512,68.731 ; Q1.8@94.489,68.708 cw(c94.742,68.456) 94.742,68.813 ; Q2.6@94.505,67.541 ccw(c94.756,67.792) Q2.6@94.756,67.437 ; Q2.6@94.659,67.908 ccw(c95.797,69.046) Q2.7@95.797,67.437 ; Q2.6@94.728,67.437 ccw(c94.728,67.792) Q2.6@94.979,67.541 ; Q2.7@95.775,67.541 ccw(c96.026,67.792) Q2.7@96.026,67.437 ; Q2.7@95.998,67.437 ccw(c95.998,67.792) Q2.7@96.249,67.541 ; Q2.7@96.249,68.241 ccw(c94.675,69.815) Q1.6@96.901,69.815 ; pad.0 96.52,72.751 96.52,70.739 ; Q1.5@96.901,71.207 96.901,70.358 ; 96.52,70.739 96.901,70.358 ; 96.52,70.739 93.98,68.199 93.98,67.437 96.901,67.437 96.901,70.358
RST: J1.7 U1.29 U2.29 | length 31
  Top Layer w0.254: U1.29@82.68,62.219 cw(c82.353,61.892) 82.816,61.892 ; U1.29@82.785,63.68 U1.29 82.816,62.843 82.816,61.837 82.935,61.718 U2.29 ; 82.816,62.042 cw(c83.067,62.042) U1.29@82.89,62.219
  Top Layer w0.381: U1.29@82.849,63.479 cw(c83.002,63.611) 82.859,63.754 85.145,66.04 ; U1.29@82.869,63.424 cw(c83.692,63.424) 83.11,64.005
  Top Layer w0.508: 85.145,66.04 96.647,66.04 98.806,68.199 98.806,70.104 ; 99.336,70.634 ccw(c98.469,71.501) J1.7@99.695,71.501 ; 99.502,70.8 cw(c100.326,69.976) J1.7@100.521,71.125 ; J1.7@99.711,71.333 cw(c99.2,71.234) 99.568,70.866 ; J1.7@99.96,70.868 ccw(c99.765,70.669) 99.568,70.866 ; J1.7@100.436,70.624 ccw(c100.125,68.785) 98.806,70.104 ; J1.7@100.965,70.866 99.568,70.866 ; 98.806,70.104 99.568,70.866
RXD: J2.1 LED1.2 U1.30 U2.30 | length 23.9
  Top Layer w0.254: U1.30 81.985,62.16 82.435,61.71 U2.30 ; U1.30@82.133,62.324 ccw(c82.886,62.324) 82.354,61.791
  Top Layer w0.381: 76.962,66.04 78.232,64.77 81.985,64.77
  Top Layer w0.508: J2.1@74.168,71.501 75.819,71.501 ; J2.1@74.595,70.93 cw(c75.819,69.905) 75.819,71.501 ; J2.1@74.595,72.072 ccw(c75.819,73.097) 75.819,71.501 ; 76.962,66.04 76.962,70.358 75.819,71.501 ; U1.30 81.985,64.77 81.985,64.84 LED1.2 ; 82.572,65.427 ccw(c81.705,66.294) LED1.2@82.931,66.294 ; LED1.2@82.878,65.733 cw(c83.312,65.3) LED1.2@83.312,65.913
SCK: J4.7 U1.17 U2.17 | length 16.6
  Top Layer w0.254: U2.17 86.735,55.874 U1.17 ; 86.412,56.197 ccw(c86.835,56.621) U1.17@86.835,56.022
  Top Layer w0.381: U1.17 87.89,55.874 91.059,52.705 93.472,52.705 ; U1.17@88.019,55.874 ccw(c88.332,55.874) 88.111,55.653
  Top Layer w0.508: J4.7@94.007,50.764 ccw(c92.03,51.263) 93.472,52.705 94.869,51.308 J4.7 ; 94.105,52.072 cw(c93.04,51.008) J4.7@94.5,50.639
TXD: J2.2 LED2.2 U1.31 U2.31 | length 31.5
  Top Layer w0.254: U1.31@81.185,62.176 cw(c81.185,61.816) 81.439,62.071 ; U1.31 81.185,62.325 81.935,61.575 U2.31 ; U1.31@81.333,62.324 ccw(c81.688,62.324) 81.437,62.073 ; 81.849,61.661 cw(c81.638,61.449) U2.31@81.937,61.449
  Top Layer w0.381: J2.2@73.914,68.008 cw(c73.914,65.402) 75.757,67.245 ; J2.2@73.914,68.389 cw(c73.914,66.703) 75.106,67.896 ; J2.2@74.473,68.25 74.752,68.25 75.819,67.183 75.819,66.294 77.978,64.135 80.899,64.135 ; J2.2@74.486,68.961 ccw(c75.559,68.961) 74.8,68.202 ; J2.2@74.867,68.961 ccw(c76.859,68.961) 75.45,67.552 ; 80.539,64.044 ccw(c80.882,64.638) v2@81.128,63.998 ; 80.915,64.124 ccw(c81.179,64.366) v2@81.183,64.008 ; U1.31@81.102,63.442 ccw(c80.366,63.602) 80.899,64.135 ; v2(81.185,63.849) 80.899,64.135 ; 80.913,64.121 cw(c80.64,63.849) 81.026,63.849 ccw(c80.64,63.849) 80.913,64.121 ; 80.913,64.121 ccw(c81.185,64.394) 81.185,64.008 cw(c81.185,64.394) 80.913,64.121 ; 80.109,64.135 cw(c80.109,62.773) 81.072,63.736 ccw(c80.109,62.773) 80.109,64.135
  Top Layer w0.508: LED2.2@80.757,71.486 cw(c79.8,70.529) v5@81.153,70.529 ; LED2.2 81.153,71.628 v5@81.153,70.612
  Bottom Layer w0.508: v2(81.185,63.849) v5@81.185,70.485
  other v5: 81.153,70.485
VCC: C1.2 L1.1 L2.2 OSC1.4 pad.1@91.313,72.644 Q1.1 Q1.2 Q1.3 R1.2 R2.2 U1.4 U1.6 U2.4 U2.6 | length 109.6
  Top Layer w0.254: U1.6 79.826,57.474 ; U1.4 79.004,59.055 79.883,59.055 ; U1.4@79.473,59.16 cw(c79.623,58.953) 79.804,59.134 ; U1.6@79.534,57.368 ccw(c79.538,57.807) 79.848,57.496 ; U1.6@79.536,57.622 ccw(c79.547,58.653) 80.276,57.924 ; U1.4@79.622,58.954 cw(c79.8,58.71) 80.014,58.924 ; U1.4@79.64,58.969 cw(c79.846,58.763) 79.846,59.055 ; U1.4@79.65,59.167 ccw(c79.883,59.353) 79.883,59.055 ; U1.6@79.655,57.387 cw(c79.826,57.262) 79.826,57.474 ; U1.6@79.655,57.561 ccw(c79.826,57.686) 79.826,57.474 ; 80.185,57.833 cw(c80.41,57.607) U2.6@80.41,57.926 ; U2.6 80.276,57.924 ; U2.4 80.014,58.924 ; 79.826,57.474 80.276,57.924 ; 79.883,59.055 80.014,58.924
  Top Layer w0.508: R1.2@77.963,69.484 ccw(c77.312,70.135) 78.232,70.135 ccw(c79.152,70.135) R1.2@78.501,69.484 ; v3(77.978,72.263) v3@78.232,72.009 ; 78.065,71.377 cw(c78.44,71.593) v3@78.194,71.949 ; R1.2 v3@78.232,72.009 ; U1.6 77.527,57.474 v3(76.708,58.293) 77.489,59.074 U1.4 ; 80.069,70.172 cw(c78.985,69.088) R2.2@80.518,69.088 ; R2.2@81.28,69.088 81.153,69.088 v3@78.232,72.009 ; v3@77.089,58.293 cw(c78.009,58.293) 77.358,58.943 ; v3@77.089,58.293 ccw(c78.009,58.293) 77.358,57.643 ; v3@77.089,58.293 ccw(c78.009,58.293) 77.358,57.643 ; v3@77.089,58.293 cw(c78.009,58.293) 77.358,58.943 ; 77.358,57.643 ccw(c76.708,56.992) 76.708,57.912 cw(c76.708,56.992) 77.358,57.643 ; 77.358,58.943 cw(c76.708,59.594) 76.708,58.674 ccw(c76.708,59.594) 77.358,58.943 ; 78.628,71.613 cw(c79.279,72.263) 78.359,72.263 ccw(c79.279,72.263) 78.628,71.613 ; 78.628,71.613 ccw(c77.978,70.962) 77.978,71.882 cw(c77.978,70.962) 78.628,71.613 ; v3@77.709,71.994 cw(c76.445,70.73) 78.232,70.73 ccw(c76.445,70.73) v3@77.709,71.994
  Top Layer w1.27: v3(77.978,72.263) 80.264,74.549 89.654,74.549 91.313,72.89 91.313,72.644 90.297,71.628 C1.2 ccw(c86.741,71.628) 86.741,71.755 v5@85.09,71.755
  Bottom Layer w0.508: v3(76.708,58.293) 76.708,54.483 78.994,52.197 93.472,52.197 95.631,54.356 v2(95.631,55.499) v2(95.631,56.896) ; OSC1.4@84.463,66.032 ccw(c83.869,66.626) OSC1.4@84.709,66.626 ; 84.709,69.215 84.709,65.913 OSC1.4@85.09,65.532 ; 84.709,69.85 84.709,71.628 cw(c84.836,71.628) v5(84.836,71.755) ; 84.709,70.625 cw(c86.855,70.625) v5@84.959,71.63 ; 76.708,57.373 cw(c77.628,57.373) 76.977,58.024 ccw(c77.628,57.373) 76.708,57.373 ; 76.708,57.373 ccw(c75.788,57.373) 76.439,58.024 cw(c75.788,57.373) 76.708,57.373
  Bottom Layer w1.27: v3(76.708,58.293) 76.708,70.866 ; 76.708,70.993 v3(77.978,72.263) ; Q1.1 pad.1@90.972,72.176
  Bottom Layer w2.032: pad.1@91.376,72.581 92.329,73.533
VIN: J3.3 L1.2 | length 13.7
  Top Layer w1.27: J3.3 89.789,76.99 L1.2@96.802,69.977 ; J3.3@90.297,77.216 ccw(c92.07,77.216) 90.816,75.962 ; 95.12,71.659 ccw(c97.091,73.63) L1.2@97.091,70.842
pads on no net: OSC1.1

## Polygon pours and split planes (outlines as drawn)
no net on Bottom Solder "Top Layer-No Net" (solid): 93.472,73.406 91.567,71.501 91.44,71.501 90.17,72.771 92.202,74.803
no net on Bottom Solder "Top Layer-No Net" (solid): 97.536,66.675 93.218,66.675 93.218,68.453 96.901,72.136 97.536,71.501 97.536,67.056
GND on Bottom Layer "Keep-Out Layer-No Net" (solid, pour order 8): 71.788,79.4 71.788,48.412 102.776,48.412 102.776,79.4

## Keep-outs
Keep-Out Layer:
  lines w0.254: 71.882,53.34 71.882,71.247 71.882,74.803 ; 71.882,53.594 ccw(c76.962,53.594) 76.962,48.514 ; 71.882,74.168 cw(c76.962,74.168) 76.962,79.248 ; 76.454,79.248 98.044,79.248 ; 76.835,48.514 97.79,48.514 ; 97.536,48.514 ccw(c97.536,53.594) 102.616,53.594 ; 97.536,79.248 cw(c97.536,74.168) 102.616,74.168 ; 102.616,53.086 102.616,74.803

## Other copper
Top Layer:
  text "MAGI" at 73.787,75.184 h1
Bottom Layer:
  rectangle net GND: 84.582,56.515 84.963,57.658
  rectangle net VCC: 84.455,69.215 84.963,69.469
  rectangle net VCC: 84.455,69.596 84.963,69.85
  rectangle net OC1A: 81.788,52.959 82.931,53.467
  rectangle net OC1A: 81.407,52.959 81.661,53.467
  rectangle net OC1B: 88.138,52.959 88.646,53.467
  rectangle net OC1B: 87.503,52.959 88.011,53.467
  rectangle net PO: 94.742,67.778 96.52,69.596
  rectangle net GND: 84.613,57.785 84.709,58.039
  rectangle net GND: 85.344,67.437 88.519,68.961
  rectangle net GND: 81.407,56.769 83.693,60.833
  rectangle net GND: 83.312,56.515 84.709,58.039
  text "MAGI" at 100.33,50.8 h0.8

## Silkscreen, mask and mechanical layers (free items; w line width, h text height)
Top Overlay:
  circle w0.33: c97.737,74.422 r0.18
  lines w0.3: 84.201,67.945 84.201,70.231 ; 84.328,65.151 84.328,67.437
Top Solder:
  lines w0.254: 79.502,58.274 79.864,58.274 80.014,58.424 80.685,58.424 ; 79.624,56.674 80.374,57.424 ; 79.635,55.874 80.518,56.757 ; 79.635,61.474 80.685,60.424 ; 79.685,60.579 80.34,59.924 80.685,59.924 ; 79.826,57.474 80.276,57.924 80.518,57.924 ; 79.826,59.874 80.276,59.424 80.685,59.424 ; 79.883,59.055 80.014,58.924 80.685,58.924 ; 80.385,55.124 81.435,56.174 ; 80.385,62.224 81.435,61.174 ; 81.185,55.054 81.935,55.804 ; 81.28,62.23 81.935,61.575 ; 81.53,58.424 81.534,58.42 ; 81.985,55.315 82.435,55.765 82.435,56.174 ; 81.985,62.16 82.435,61.71 82.435,61.595 ; 82.804,55.372 82.935,55.503 82.935,56.007 ; 82.816,62.103 82.816,61.837 82.935,61.718 ; 83.435,61.468 83.435,61.693 83.566,61.824 83.566,62.23 ; 83.439,55.88 83.439,55.499 83.585,55.353 83.585,55.193 ; 83.935,56.174 83.935,55.765 84.455,55.245 84.455,55.174 ; 83.947,61.454 83.947,61.722 84.385,62.16 ; 84.435,55.804 84.963,55.276 ; 84.435,61.55 85.185,62.3 ; 84.935,56.035 84.991,56.035 85.852,55.174 ; 84.935,61.174 85.985,62.224 ; 85.685,60.424 86.602,61.341 86.685,61.341 ; 85.852,58.424 86.229,58.424 86.36,58.293 86.614,58.293 ; 85.979,58.928 86.233,58.928 86.36,59.055 86.995,59.055 ; 85.996,59.924 86.651,60.579 ; 86.016,57.404 86.746,56.674 ; 86.094,59.424 86.544,59.874 ; 86.106,57.912 86.544,57.474 87.385,57.474 ; 92.127,73.735 92.329,73.533
  lines w0.305: 84.991,56.035 85.985,55.041 85.985,54.985 ; 85.685,56.924 86.735,55.874 86.995,55.874
  lines w1.27: 89.789,77.216 89.789,76.99 95.631,71.148 ; 90.043,71.374 90.805,72.136 90.805,72.644 ; 92.329,77.216 92.329,76.942 96.373,72.898
Bottom Solder:
  rectangle: 84.455,68.961 84.963,69.469
  rectangle: 84.455,69.596 84.963,70.104
  rectangle: 81.788,52.959 82.296,53.467
  rectangle: 81.153,52.959 81.661,53.467
  rectangle: 83.566,57.023 84.836,57.912
  rectangle: 81.534,57.023 83.566,60.325
  rectangle: 88.138,52.959 88.646,53.467
  rectangle: 87.503,52.959 88.011,53.467
  lines w1.27: 94.869,77.216 98.425,73.66 98.425,63.119 ; 96.52,70.739 96.52,72.898
  lines w1.778: 94.996,62.738 98.044,62.738 98.425,63.119
Mechanical 1:
  lines w0.254: 71.882,53.34 71.882,71.247 71.882,74.803 ; 71.882,53.594 ccw(c76.962,53.594) 76.962,48.514 ; 71.882,74.168 cw(c76.962,74.168) 76.962,79.248 ; 76.454,48.514 97.79,48.514 ; 76.454,79.248 98.044,79.248 ; 97.536,48.514 ccw(c97.536,53.594) 102.616,53.594 ; 97.536,79.248 cw(c97.536,74.168) 102.616,74.168 ; 102.616,53.086 102.616,74.803